# Altium PCB USB_Interface_PCB.PcbDoc
Units mm, origin at the board's own origin, x right, y up, seen from the top; angles counter-clockwise.
Board outline 42 x 21 mm, 2 copper layers (Top Layer, Bottom Layer); 32 components, 22 nets, 95 pads, 22 vias.
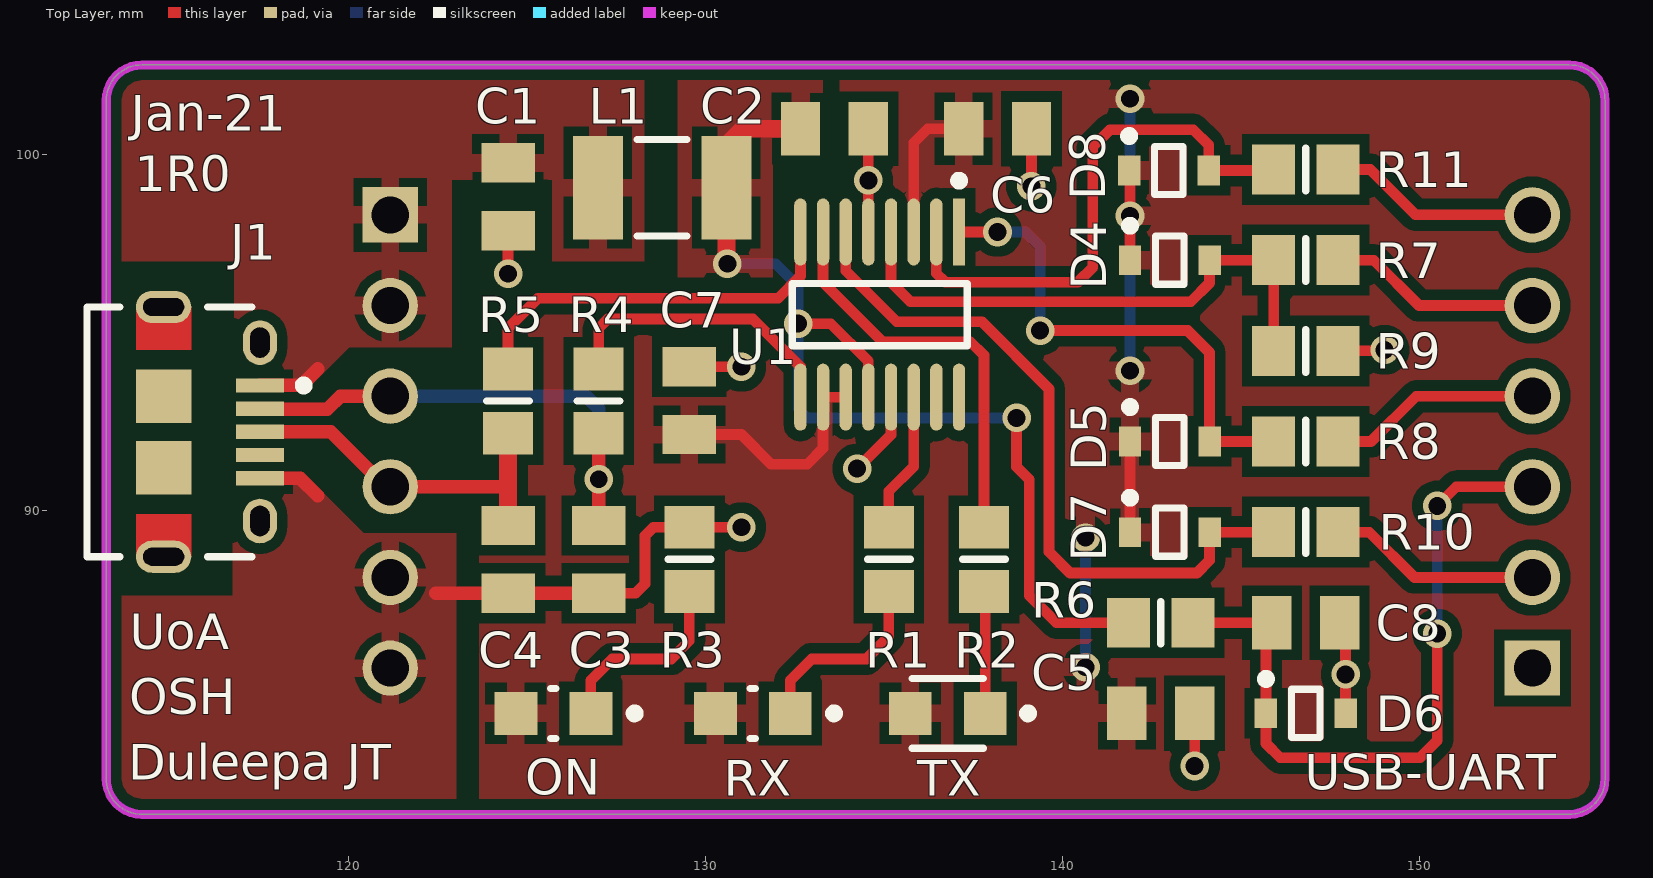
[diagram p0: Top Layer view]
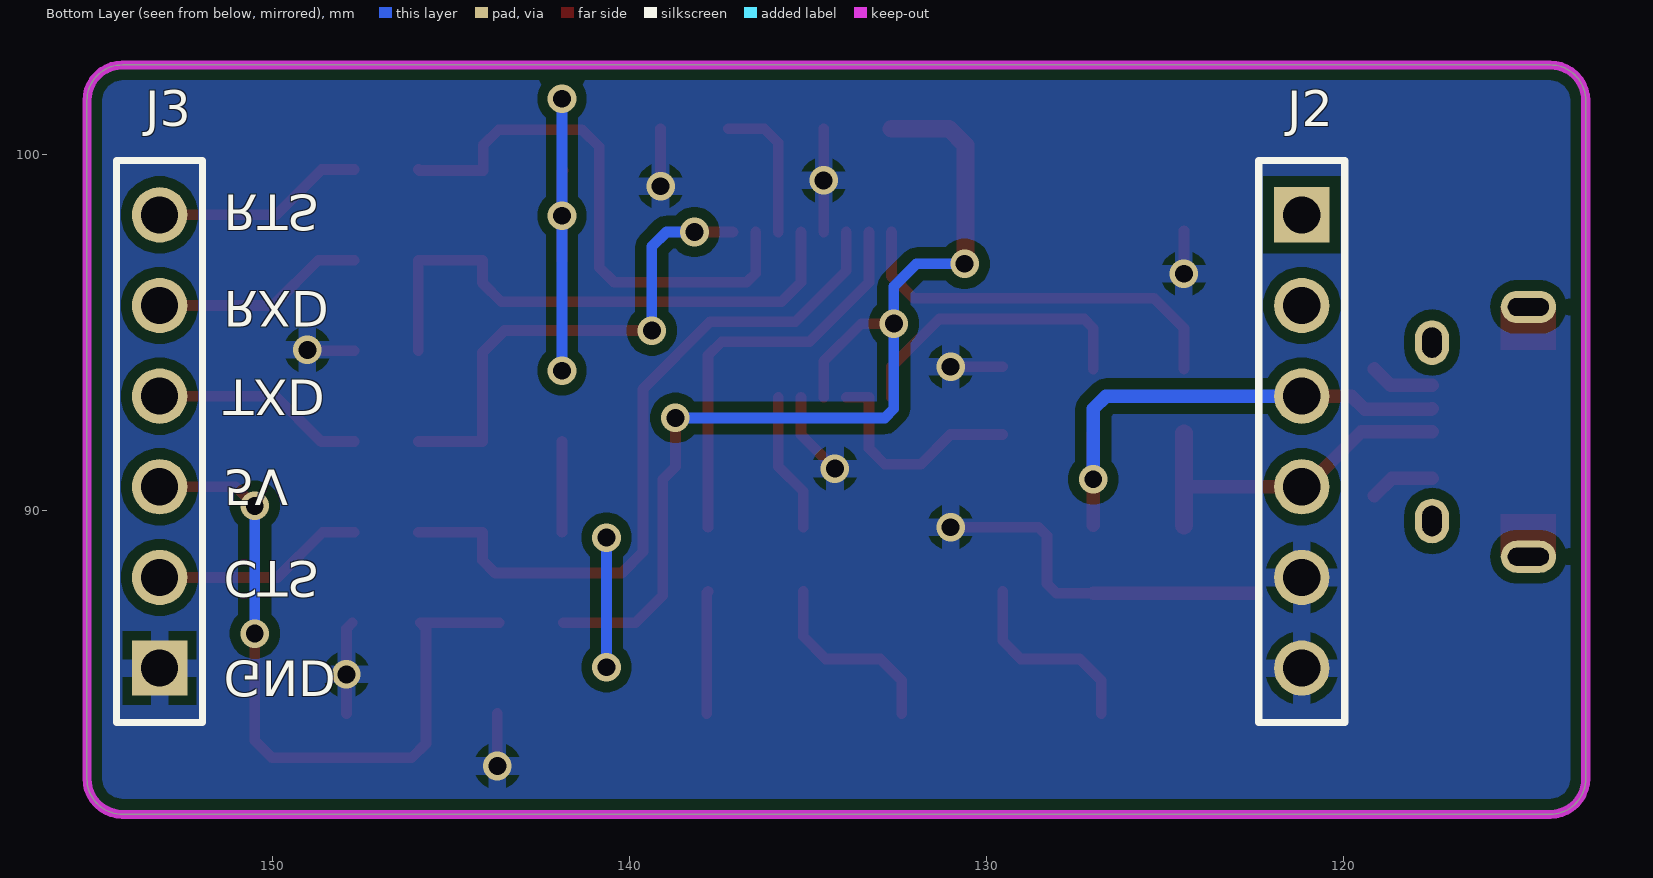
[diagram p1: Bottom Layer view, seen from below]

## Layer stack, top to bottom
Top Solder: solder mask 0.0102, Solder Resist, Dk 3.5
Top Layer: signal copper 0.0356
Dielectric 1: dielectric 0.32, FR-4, Dk 4.8
Bottom Layer: signal copper 0.0356
Bottom Solder: solder mask 0.0102, Solder Resist, Dk 3.5

## Board outline
113.2,82.5 ccw(c114.2,82.5) 114.2,81.5 154.2,81.5 ccw(c154.2,82.5) 155.2,82.5 155.2,101.5 ccw(c154.2,101.5) 154.2,102.5 114.2,102.5 ccw(c114.2,101.5) 113.2,101.5

## Design rules (kind name [scope] priority, off if disabled: settings)
BoardOutlineClearance [All] p1: gap=0.2 ignorepadtopadclearanceinfootprint=FALSE except(0.4: Arc-SplitBarrior Arc-SplitContinuation Track-SplitBarrior Track-SplitContinuation SMDPad-SplitBarrior SMDPad-SplitContinuation THPad-SplitBarrior THPad-SplitContinuation Via-SplitBarrior Via-SplitContinuation Fill-SplitBarrior Fill-SplitContinuation Poly-SplitBarrior Poly-SplitContinuation Region-SplitBarrior Region-SplitContinuation Text-SplitBarrior Text-SplitContinuation)
Clearance Polygons [IsRegion] p1: gap=0.3 ignorepadtopadclearanceinfootprint=FALSE
Clearance USB_Con [InComponent('J1')] p2: gap=0.2 ignorepadtopadclearanceinfootprint=FALSE
Clearance "Clearance Bottom Layer" [OnLayer('Bottom Layer')] p3: gap=0.254 ignorepadtopadclearanceinfootprint=TRUE
Clearance "Clearance Top Layer" [OnLayer('Top Layer')] p4: gap=0.254 ignorepadtopadclearanceinfootprint=TRUE
Clearance [All] p5: gap=0.2 ignorepadtopadclearanceinfootprint=FALSE except(0.089: Arc-Arc Arc-Track Arc-SMDPad Track-Track Track-SMDPad SMDPad-SMDPad; 0.127: Arc-Via Track-Via SMDPad-Via THPad-Via Via-Via; 0.254: Arc-Text Track-Text SMDPad-Text THPad-Text Via-Text Fill-Text Poly-Text Region-Text Text-Text)
HoleSize [All] p1: absolutevalues=TRUE maxlimit=6.3 minlimit=0.2 maxpercent=80.000 minpercent=20.000
MinimumAnnularRing [All] p1: minimumring=0.076
MinimumSolderMaskSliver [All] p1: minsoldermaskwidth=0.1
PolygonConnect PolygonConnect_1 [All] p1: connectstyle=Relief reliefconductorwidth=0.508 reliefentries=4 polygonreliefangle="90 Angle" airgapwidth=0.254
RoutingCorners [All] p1: cornerstyle=Round minsetback=2.54 maxsetback=2.54
RoutingVias [All] p1: holewidth=0.5 width=1 viastyle="Through Hole" minholewidth=0.2 minwidth=0.45 maxholewidth=1 maxwidth=2
SilkToSilkClearance [All] p1: silktosilkclearance=0.1
SilkToSolderMaskClearance [IsPad] p1: minsilkscreentomaskgap=0.1 clearancetoexposedcopper=TRUE
SolderMaskExpansion [All] p1: expansion=0.102 istentingtop=FALSE
Width [All] p1: maxlimit=2.54 minlimit=0.089 preferedwidth=0.381
25 further rules are at their usual default settings.

## Components (designator, comment, footprint, x,y, rotation, side; value= is the part's Value field where it differs from the comment)
C1 "Capacitor 0805" C0805 124.46,98.806 r270 top value=100nF
C2 "Capacitor 0805" C0805 133.604,100.711 r0 top value=1uF
C3 "Capacitor 0805" C0805 127,88.646 r90 top value=47pF
C4 "Capacitor 0805" C0805 124.46,88.646 r90 top value=47pF
C5 "Capacitor 0805" C0805 142.748,84.328 r0 top value=100nF
C6 "Capacitor 0805" C0805 138.176,100.711 r0 top value=100nF
C7 "Capacitor 0805" C0805 129.54,93.091 r270 top value=100nF
C8 "Capacitor 0805" C0805 146.812,86.868 r180 top value=100nF
D4 "BAT54HT1" ONSC-SOD-323-2-477-02_V 143.002,97.028 r0 top
D5 "BAT54HT1" ONSC-SOD-323-2-477-02_V 143.002,91.948 r0 top
D6 "BAT54HT1" ONSC-SOD-323-2-477-02_V 146.812,84.328 r0 top
D7 "BAT54HT1" ONSC-SOD-323-2-477-02_V 143.002,89.408 r0 top
D8 "BAT54HT1" ONSC-SOD-323-2-477-02_V 142.977,99.543 r0 top
J1 "10118194-0001LF" FCI-10118194-0001LF-5_V 116.158,92.218 r270 top
J2 "HDR1x6" SMTC-SSW-106-02-X-S 121.158,98.298 r270 bottom
J3 "HDR1x6" SMTC-SSW-106-02-X-S 153.162,85.598 r90 bottom
L1 "FBMH3225HM102NT" TAYO-3225-2_V 128.778,99.06 r0 top
ON "LGR971-KN-1" FP-LG_R971-MFG 125.73,84.328 r180 top
R1 "Resistor 0805" R0805 135.128,88.646 r90 top value=390R
R2 "Resistor 0805" R0805 137.795,88.646 r90 top value=390R
R3 "Resistor 0805" R0805 129.54,88.646 r90 top value=330R
R4 "Resistor 0805" R0805 127,93.08 r90 top value=27R
R5 "Resistor 0805" R0805 124.46,93.08 r90 top value=27R
R6 "Resistor 0805" R0805 142.748,86.868 r0 top value=N.F.
R7 "Resistor 0805" R0805 146.812,97.028 r0 top value=10k
R8 "Resistor 0805" R0805 146.812,91.948 r0 top value=10k
R9 "Resistor 0805" R0805 146.812,94.488 r0 top value=6k2
R10 "Resistor 0805" R0805 146.812,89.408 r0 top value=10k
R11 "Resistor 0805" R0805 146.812,99.568 r0 top value=10k
RX "LGR971-KN-1" FP-LG_R971-MFG 131.318,84.328 r180 top
TX "LSR976-NR-1" FP-LS_R976-MFG 136.779,84.328 r180 top
U1 "FT230XS-R" FP-SSOP-16-IPC_C 134.874,95.504 r270 top

## Footprints (in the part's own frame and the unit in brackets; to place one, negate y for a bottom-side part, rotate by r counter-clockwise, add the part's x,y. Pads: shape width x height; smd on the part's side, far side on the other; paste and mask are expansions set on the pad)
C0805 [mm]
  rect 1.1x1.5 smd: 1(-0.95,0) 2(0.95,0)
  body extent -1.1,-0.72 1.1,0.72, height 1.1
FCI-10118194-0001LF-5_V [mm] "SMD, 5-Leads, Body 7x5mm, Pitch 0.65 mm"
  rect 0.4x1.35 smd: 1(-1.3,1.35) 2(-0.65,1.35) 3(0,1.35) 4(0.65,1.35) 5(1.3,1.35)
  oval 1.25x0.95 hole 0.55 slot 0.85 at 0 deg: 6(-2.5,1.35) 7(2.5,1.35)
  oval 0.9x1.55 hole 0.5 slot 1.15 at 90 deg: 8(-3.5,-1.35) 9(3.5,-1.35)
  rect 1.5x1.55 smd: 10(-1,-1.35) 11(1,-1.35)
  Top Layer region: 3.5,-2.125 3.5,-0.575 2.3,-0.575 2.3,-2.125
  Top Layer region: -2.3,-2.125 -2.3,-0.575 -3.5,-0.575 -3.5,-2.125
  silkscreen extent -3.5,-3.5 3.5,2.7, body extent -4.02,-4.03 4.02,1.55, height 2.72
FP-LG_R971-MFG [mm]
  rect 1.2x1.2 smd paste+0 mask+0: 1(-1.05,0) 2(1.05,0)
  silkscreen extent -2.4,-0.7 0.08,0.7, body extent -1.75,-0.8 1.75,0.8, height 0.25
FP-LS_R976-MFG [mm]
  rect 1.2x1.2 smd paste+0 mask+0: 1(-1.05,0) 2(1.05,0)
  silkscreen extent -2.38,-0.97 1,0.97, body extent -1.75,-0.8 1.75,0.8, height 0.25
FP-SSOP-16-IPC_C [mil]
  rect 73.91x13.66 smd paste+0 mask+0: 1(-91.07,87.5)
  rrect100% 73.91x13.66 smd paste+0 mask+0: 2(-91.07,62.5) 3(-91.07,37.5) 4(-91.07,12.5) 5(-91.07,-12.5) 6(-91.07,-37.5) 7(-91.07,-62.5) 8(-91.07,-87.5) 9(91.07,-87.5) 10(91.07,-62.5) 11(91.07,-37.5) 12(91.07,-12.5) 13(91.07,12.5) 14(91.07,37.5) 15(91.07,62.5) 16(91.07,87.5)
  silkscreen extent -153,-96 34,96, body extent -132,-100 132,100, height 10
ONSC-SOD-323-2-477-02_V [mm] "SOD, 2-Leads, Body 1.7x1.25mm"
  rect 0.63x0.83 smd: 1(-1.115,0) 2(1.115,0)
  silkscreen extent -1.24,-0.67 0.4,1.09, body extent -0.85,-0.63 0.85,0.63, height 1.06
R0805 [mm]
  rect 1.2x1.4 smd: 1(-0.9,0) 2(0.9,0)
  silkscreen extent 0,-0.6 0,0.6, body extent -1.07,-0.7 1.07,0.7, height 0.65
SMTC-SSW-106-02-X-S [mm] "SQ Post Socket, 1x6 Pins, Vertical, 2.54mm Pitch, Female"
  rect 1.55x1.55 hole 1.04: 1(0,0)
  round 1.55 hole 1.04: 2(2.54,0) 3(5.08,0) 4(7.62,0) 5(10.16,0) 6(12.7,0)
  silkscreen extent -1.53,-1.2 14.23,1.2, body extent -1.52,-1.21 14.22,1.21, height 8.51
TAYO-3225-2_V [mm] "Chip Inductor, 2-Leads, Body 3.50x2.80mm"
  rect 1.4x2.9 smd: 1(-1.8,0) 2(1.8,0)
  silkscreen extent -0.7,-1.35 0.7,1.35, body extent -1.75,-1.4 1.75,1.4, height 2.8

## Part data
C1 C2 C3 C4 C5 C6 C7 C8: library part CCAP0805, "CCAP0805"
D4 D5 D6 D7 D8: library part CMP-004-00000-1, "DIODE SCHOTTKY 30V 200MA SOD323"
J1: library part CMP-00028-00000-1, "CONN USB MICRO B RECPT SMT R/A"
J2 J3: library part CMP-002-00001-2, "CONN RCPT 6POS 0.1 TIN PCB"
L1: library part CMP-006-00000-1, "TAIYO YUDEN         FBMH3225HM102NT            Ferrite Case Style:1210 [3225 Metric]"
ON RX: library part CMP-007-00001-2, "LED Uni-Color Green 572nm 2-Pin SMD T/R"
R1 R2 R3 R4 R5 R6 R7 R8 R9 R10 R11: library part RES0805, "RES0805"
TX: library part CMP-007-00000-2, "LED RED DIFFUSED 0805 SMD"
U1: library part CMP-015-00001-2, "USB-to-UART 1-CH 512byte FIFO 5V 16-Pin SSOP T/R"

## Via types
v1: diameter 0.8, hole 0.5, Top Layer to Bottom Layer, tented both sides, 22 vias

## Nets (pads, with @x,y where several pads share a name; then routed paths per layer and width w, separated by ;. In a path a pad name is that pad's centre, name@x,y a point inside that pad or via, vN(x,y) a via of type N, cw(c..) or ccw(c..) an arc to the next point about the centre after c; other vN are vias at no path point)
3V3: C5.1 C6.1 C7.2 D4.1 D5.1 D7.1 D8.1 ON.2 RX.2 TX.2 U1.3 U1.10 U1.11 | length 26.7
  Top Layer w0.3: C7.2 130.998,92.141 131.826,91.313 132.842,91.313 133.286,91.757 U1.10 U1.11 ; U1.3 135.826,100.317 136.22,100.711 C6.1 ; D8.1 141.887,99.517 v1(141.887,98.273) D4.1 ; D7.1 D5.1
  Bottom Layer w0.3: v1(140.64,85.623) v1(140.64,89.256) ; v1(141.887,93.932) v1(141.887,98.273) v1(141.887,101.552)
5V: C2.1 L1.2 R6.1 U1.12 | length 29.1
  Top Layer w0.3: v1(132.588,95.25) 133.502,95.25 134.556,94.196 U1.12 ; v1@138.709,92.583 138.709,91.237 139.065,90.881 139.065,87.63 139.827,86.868 R6.1
  Top Layer w0.5: v1(130.607,96.926) 130.578,96.955 L1.2 130.578,100.25 131.039,100.711 C2.1
  Bottom Layer w0.3: v1(130.607,96.926) 131.953,96.926 132.588,96.291 v1(132.588,95.25) 132.588,92.862 132.842,92.608 v1(138.709,92.608)
5V_U: C8.2 D6.1 J3.3 R6.2 | length 20.3
  Top Layer w0.3: R6.2 C8.2 145.697,86.703 D6.1 145.697,83.487 146.101,83.083 150.012,83.083 150.495,83.566 v1(150.495,86.563) ; v1(150.495,90.145) 151.028,90.678 J3.3
  Bottom Layer w0.3: v1(150.495,86.563) v1(150.495,90.145)
5V_USB: C1.1 J1.1 J2.1 J2.2 L1.1 | length 1.8
  Top Layer w0.381: J1.1 118.664,93.518 119.126,93.98
GND: C1.2 C2.2 C3.1 C4.1 C5.2 C6.2 C7.1 C8.1 D6.2 J1.5 J2.5 J2.6 J3.1 R3.2 R9.2 U1.5 U1.13 | length 26.9
  Top Layer w0.3: v1(124.46,96.647) C1.2 ; C3.1 128.031,87.696 128.295,87.96 128.295,89.306 128.535,89.546 R3.2 v1(130.998,89.546) ; C7.1 v1(130.998,94.041) ; v1(134.239,91.186) 135.191,92.138 U1.13 ; C2.2 134.556,100.709 v1(134.556,99.263) U1.5 ; v1(139.126,99.101) C6.2 ; v1(143.698,82.855) C5.2 ; R9.2 v1@149.022,94.488 ; C8.1 147.927,86.703 v1(147.927,85.422) D6.2
  Top Layer w0.381: J1.5 118.632,90.918 119.126,90.424 ; 122.428,87.696 C4.1 C3.1
  other v1: 149.022,94.513
NetC3_2: C3.2 J1.2 J2.3 R4.1 | length 14.4
  Top Layer w0.381: J1.2 117.523,92.853 119.396,92.853 119.761,93.218 J2.3 ; C3.2 v1(127,90.888) R4.1
  Bottom Layer w0.381: J2.3 126.644,93.218 127,92.862 v1(127,90.888)
NetC4_2: C4.2 J1.3 J2.4 R5.1 | length 10.2
  Top Layer w0.381: J1.3 119.491,92.218 121.031,90.678 J2.4 124.333,90.678 124.46,90.551
  Top Layer w0.5: C4.2 124.46,90.551 R5.1
NetD4_2: D4.2 R7.1 R9.1 U1.4 | length 15.8
  Top Layer w0.3: U1.4 135.191,96.406 135.738,95.86 143.586,95.86 144.117,96.39 D4.2 R7.1 R9.1
NetD5_2: D5.2 R8.1 U1.1 | length 14.1
  Top Layer w0.3: U1.1 v1(138.174,97.817) ; v1(139.37,95.056) 143.501,95.056 144.117,94.44 D5.2 R8.1
  Bottom Layer w0.3: v1(138.174,97.817) 138.962,97.817 139.37,97.409 v1(139.37,95.056)
NetD7_2: D7.2 R10.1 U1.6 | length 20.2
  Top Layer w0.3: U1.6 133.921,96.732 135.353,95.301 137.739,95.301 139.619,93.421 139.619,88.854 140.208,88.265 143.764,88.265 144.117,88.618 D7.2 R10.1
NetD8_2: D8.2 R11.1 U1.2 | length 15.4
  Top Layer w0.3: U1.2 136.462,96.66 136.708,96.414 140.432,96.414 140.843,96.825 140.843,100.203 141.326,100.686 143.662,100.686 144.092,100.256 D8.2 145.887,99.543 R11.1
NetJ3_2: J3.2 R10.2 | length 6
  Top Layer w0.3: R10.2 148.59,89.408 149.86,88.138 J3.2
NetJ3_4: J3.4 R8.2 | length 6
  Top Layer w0.3: R8.2 148.641,91.948 149.911,93.218 J3.4
NetJ3_5: J3.5 R7.2 | length 6
  Top Layer w0.3: R7.2 148.717,97.028 149.987,95.758 J3.5
NetJ3_6: J3.6 R11.2 | length 6
  Top Layer w0.3: R11.2 148.615,99.568 149.885,98.298 J3.6
NetON_1: ON.1 R3.1 | length 5.5
  Top Layer w0.3: ON.1 126.78,85.251 127.381,85.852 129.032,85.852 129.54,86.36 R3.1
NetR1_1: R1.1 RX.1 | length 5.5
  Top Layer w0.3: RX.1 132.368,85.251 132.969,85.852 134.493,85.852 135.128,86.487 R1.1
NetR1_2: R1.2 U1.14 | length 3.9
  Top Layer w0.3: R1.2 135.128,90.551 135.826,91.249 U1.14
NetR2_1: R2.1 TX.1 | length 3.4
  Top Layer w0.3: R2.1 137.829,87.712 TX.1
NetR2_2: R2.2 U1.7 | length 11.6
  Top Layer w0.3: U1.7 133.286,96.406 133.68,96.012 134.95,94.742 137.414,94.742 137.795,94.361 R2.2
NetR4_2: R4.2 U1.9 | length 8.3
  Top Layer w0.3: R4.2 127,95.123 127.254,95.377 131.318,95.377 132.651,94.043 U1.9
NetR5_2: R5.2 U1.8 | length 11.2
  Top Layer w0.3: R5.2 124.46,95.123 125.298,95.961 132.029,95.961 132.651,96.584 U1.8
pads on no net: J1.4 J1.6 J1.7 J1.8 J1.9 J1.10 J1.11 U1.15 U1.16

## Polygon pours and split planes (outlines as drawn)
3V3 on Top Layer "3V3_L01_P003" (solid, pour order 3): 133.756,97.206 132.334,95.783 123.647,95.783 123.647,81.483 154.483,81.483 155.219,82.22 155.219,101.905 154.624,102.5 133.756,102.5
5V on Top Layer "5V_L01_P002" (solid, pour order 2): 129.21,96.545 129.21,102.464 133.274,102.464 133.274,99.746 131.877,99.746 131.877,96.545
5V_USB on Top Layer "5V_USB_L01_P001" (solid, pour order 1): 122.885,99.289 125.705,99.289 125.705,97.003 128.27,97.003 128.27,102.489 122.911,102.489 122.86,102.54 113.919,102.489 113.157,101.727 113.157,97.003 116.789,97.003 116.789,93.421 118.847,93.421 120.015,94.59 122.885,94.59
GND on Top Layer "GND_L01_P000" (solid, pour order 0): 116.738,81.534 116.713,81.559 113.259,81.559 113.259,87.63 116.738,87.63 116.738,90.881 118.923,90.881 120.421,89.383 123.012,89.383 123.012,81.534
GND on Bottom Layer "GND_L02_P004" (solid, pour order 4): 113.2,82.126 113.817,81.509 154.356,81.509 155.219,82.372 155.194,82.398 155.194,101.702 154.33,102.565 113.894,102.565 113.2,101.872

## Keep-outs
Keep-Out Layer:
  the board outline again, w0.254

## Silkscreen, mask and mechanical layers (free items; w line width, h text height)
Top Overlay:
  text "Jan-21" at 113.89,100.657 h1
  text "1R0" at 113.992,98.955 h1
  text "UoA" at 113.865,86.128 h1
  text "OSH" at 113.84,84.299 h1
  text "Duleepa JT" at 113.814,82.474 h1
  text "USB-UART" at 146.783,82.191 h1
Bottom Overlay:
  text "RTS" at 151.359,98.857 h1 r180
  text "RXD" at 151.359,96.164 h1 r180
  text "TXD" at 151.359,93.675 h1 r180
  text "5V" at 151.359,91.161 h1 r180
  text "CTS" at 151.359,88.595 h1 r180
  text "GND" at 151.359,85.801 h1 r180
Mechanical 1:
  the board outline again, w0.254

## Text inside footprints (layer, text, board x,y; h text height)
J1: Mechanical 6 "PCB EDGE" at 113.258,99.418 h1 r270